# Altium PCB XPIAC_1V3.PCBDOC (part 4 of 4)
Units mil, origin at the board's own origin, x right, y up, seen from the top; angles counter-clockwise.
Board outline 2900 x 2135 mil, 6 copper layers (Top Layer, Internal Plane 1, Mid-Layer 1, Mid-Layer 2, Mid-Layer 3, Bottom Layer); 175 components, 110 nets, 675 pads, 395 vias.
Unrouted connection lines stored in the file: 142.
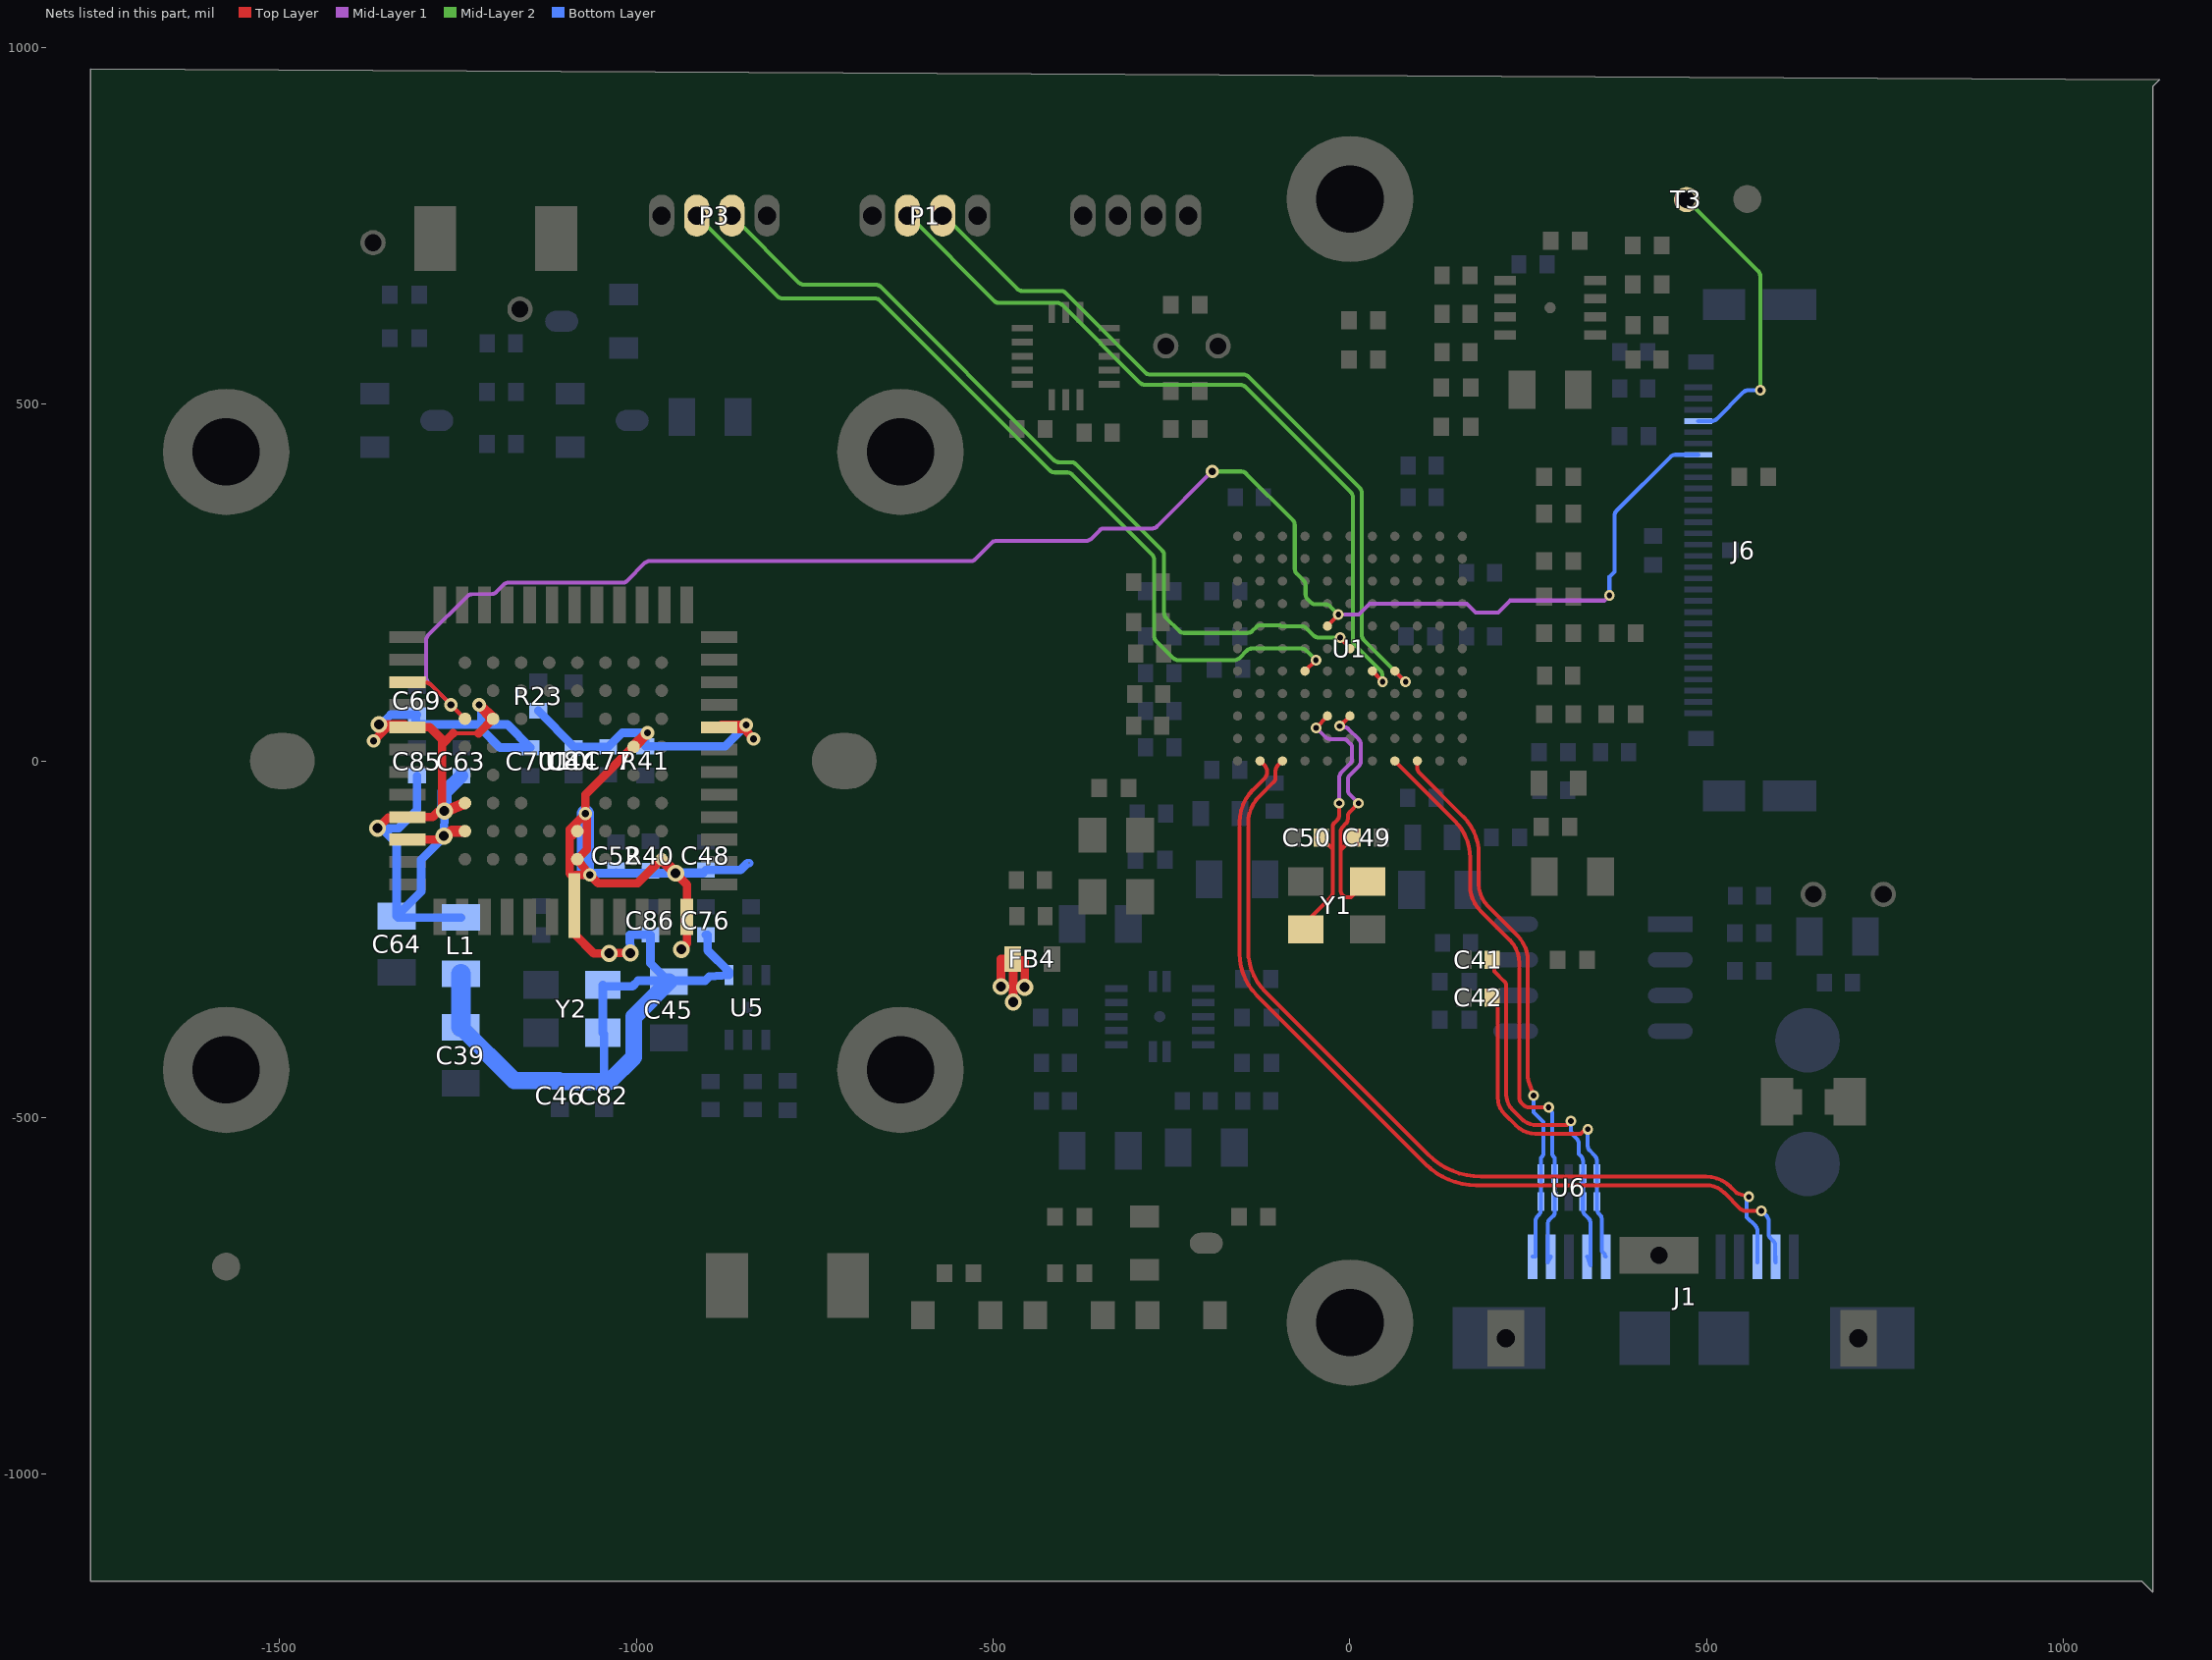
[diagram p8: the nets of this part, all layers, seen from the top]

## Via types
v1: diameter 15, hole 7.87, Top Layer to Bottom Layer, 163 vias
v2: diameter 19, hole 9.84, Top Layer to Bottom Layer, 131 vias
v3: diameter 23.62, hole 13.78, Top Layer to Bottom Layer, 77 vias
v4: diameter 27.95, hole 15.75, Top Layer to Bottom Layer, 17 vias
v5: diameter 0, hole 0, Top Layer to Bottom Layer, 3 vias
v6: diameter 20.47, hole 11.81, Top Layer to Bottom Layer, 2 vias
v7: diameter 35, hole 19.68, Top Layer to Bottom Layer, 2 vias

## Nets (pads, with @x,y where several pads share a name; then routed paths per layer and width w, separated by ;. In a path a pad name is that pad's centre, name@x,y a point inside that pad or via, vN(x,y) a via of type N, cw(c..) or ccw(c..) an arc to the next point about the centre after c; other vN are vias at no path point) (continued)
SS_DM: J1.2 U1.A10 | length 1264.1
  Top Layer w5.5: U1.A10@-125.98,0 -119.06,-6.93 cw(c-125.86,-13.73) -116.24,-13.73 -116.24,-16.93 cw(c-125.86,-16.93) -119.06,-23.73 -135.71,-40.39 ccw(c-90.3,-85.8) -154.52,-85.8 -154.52,-269.94 ccw(c-70.93,-269.94) -130.04,-329.05 106.19,-565.28 ccw(c176.95,-494.51) 176.95,-594.59 498.58,-594.59 cw(c498.58,-631.87) 524.95,-605.51 547.29,-627.85 ccw(c554.09,-621.04) 554.09,-630.67 v1(576.73,-630.67)
  Bottom Layer w5.5: v1(576.73,-630.67) 583.89,-637.83 cw(c577.09,-644.63) 586.71,-644.63 586.71,-662.18 ccw(c596.34,-662.18) 589.53,-668.99 593.34,-672.8 cw(c586.54,-679.61) 596.16,-679.61 596.16,-699.87 ccw(c605.79,-699.87) 596.24,-701.12 596.46,-702.75 J1.2@596.46,-694.88
SS_DP: J1.3 U1.A9 | length 1241.9
  Top Layer w5.5: U1.A9@-94.49,0 -101.42,-6.93 ccw(c-94.61,-13.73) -104.24,-13.73 -104.24,-22.93 cw(c-113.86,-22.93) -107.06,-29.74 -127.04,-49.72 ccw(c-89.66,-87.1) -142.52,-87.1 -142.52,-266.21 ccw(c-61.92,-266.21) -118.91,-323.2 109.62,-551.74 ccw(c184.1,-477.26) 184.1,-582.59 499.03,-582.59 cw(c499.03,-630.78) 533.11,-596.7 540.59,-604.18 ccw(c547.39,-597.37) 544.6,-606.58 v1(559.06,-610.97)
  Bottom Layer w5.5: v1(559.06,-610.97) 556.26,-613.77 556.26,-639.54 568.05,-651.33 cw(c561.24,-658.13) 570.87,-658.13 570.87,-702.75 J1.3@570.87,-694.88
SS_RX_M: J1.9 U1.A4 U6.4 U6.7 | length 817.7
  Top Layer w5.5: U1.A4@62.99,0 146.79,-83.79 cw(c94.58,-136) 168.41,-136 168.41,-174.58 ccw(c218.81,-174.58) 183.17,-210.21 223.92,-250.97 cw(c191.47,-283.41) 237.36,-283.41 237.36,-472.52 ccw(c246.99,-472.52) 240.18,-479.33 243.54,-482.68 ccw(c250.34,-475.88) 250.34,-485.5 v1(278.44,-485.5)
  Bottom Layer w5.5: v1(278.44,-485.5) 280.5,-487.56 cw(c273.69,-494.36) 283.31,-494.36 283.31,-548.59 ccw(c292.94,-548.59) 286.13,-555.4 287.16,-556.42 U6.7@287.16,-578.16 ; J1.9@281.5,-694.88 277.2,-702.75 277.2,-649.48 cw(c286.83,-649.48) 280.02,-642.67 284.34,-638.35 ccw(c277.53,-631.55) 287.16,-631.55 U6.4@287.16,-617.53
  Bottom Layer w5.6: U6.4@287.16,-617.53 U6.7@287.16,-578.16
SS_RX_P: J1.10 U1.A3 U6.5 U6.6 | length 766.8
  Top Layer w5.5: U1.A3@94.49,0 94.49,-9.74 ccw(c104.11,-9.74) 97.31,-16.55 158.67,-77.91 cw(c105.76,-130.83) 180.59,-130.83 180.59,-172.44 ccw(c224.58,-172.44) 193.48,-203.55 234.42,-244.49 cw(c198.35,-280.57) 249.36,-280.57 249.36,-444.36 ccw(c258.99,-444.36) 249.88,-447.48 v1(257.23,-468.91)
  Top Layer w5.6: v1@256.68,-468.36 v1(257.23,-468.91)
  Bottom Layer w5.5: J1.10@255.91,-694.88 260.17,-694.88 260.17,-644.76 cw(c269.79,-644.76) 262.99,-637.95 264.65,-636.28 ccw(c257.85,-629.48) 267.47,-629.48 U6.5@267.47,-617.53 ; 257.23,-492.13 271.31,-506.21 271.31,-548.59 cw(c261.69,-548.59) 268.5,-555.4 267.47,-556.42 U6.6@267.47,-578.16
  Bottom Layer w5.6: 257.23,-492.13 v1(257.23,-468.91) ; U6.5@267.47,-617.53 U6.6@267.47,-578.16
SS_TX_M: C42.2 J1.6 U6.1 U6.10 | length 500.2
  Top Layer w5.5: C42.2@199.37,-331.68 204.34,-336.65 cw(c197.53,-343.45) 207.16,-343.45 207.16,-471.91 ccw(c239.56,-471.91) 216.65,-494.82 232.95,-511.12 ccw(c260.12,-483.95) 260.12,-522.37 323.2,-522.37 329.36,-516.22 v1(333.35,-516.22)
  Bottom Layer w5.5: v1(333.35,-516.22) 333.35,-539.57 ccw(c342.97,-539.57) 336.17,-546.38 343.39,-553.6 cw(c336.59,-560.41) 346.21,-560.41 U6.10@346.21,-578.16
  Bottom Layer w5.6: U6.10@346.21,-578.16 U6.1@346.21,-617.53 U6.1@346.21,-627.98 ; J1.6@358.27,-694.88 357.42,-694.04 357.42,-691.47 353.09,-687.14 353.09,-642.97 ; U6.1@346.21,-627.98 ccw(c356.01,-627.98) 349.08,-634.91 ; U6.1@346.21,-627.98 ccw(c356.01,-627.98) 349.08,-634.91 ; 349.08,-634.91 350.22,-636.04 ; 350.22,-636.04 cw(c343.29,-642.97) 353.09,-642.97 ; 350.22,-636.04 cw(c343.29,-642.97) 353.09,-642.97
SS_TX_P: C41.2 J1.7 U6.2 U6.9 | length 538.6
  Top Layer w5.5: C41.2@199.37,-278.88 202.19,-278.88 202.19,-294.89 216.34,-309.04 cw(c209.53,-315.84) 219.16,-315.84 219.16,-467.77 ccw(c249.53,-467.77) 228.05,-489.26 239.9,-501.1 ccw(c262.29,-478.71) 262.29,-510.37 304.02,-510.37 v1(309.59,-504.81)
  Bottom Layer w5.5: v1(309.59,-504.81) 309.59,-517.18 ccw(c319.21,-517.18) 312.41,-523.98 317.81,-529.39 cw(c311.01,-536.19) 320.63,-536.19 320.63,-550.74 320.85,-550.74 323.71,-553.6 cw(c316.9,-560.41) 326.53,-560.41 U6.9@326.53,-578.16
  Bottom Layer w5.6: U6.9@326.53,-578.16 U6.2@326.53,-617.53 326.53,-629.03 ccw(c336.33,-629.03) 329.4,-635.96 334.36,-640.93 cw(c327.43,-647.86) 337.23,-647.86 337.23,-707.31 J1.7@332.68,-694.88
STANDBY: J6.7 U1.G7 U8.F8 U10.33 | length 2549.8
  Top Layer w5.6: U10.33@-1320.87,110.24 -1320.23,109.6 -1294.76,109.6 cw(c-1294.76,99.8) -1287.83,106.73 v2(-1259.84,78.74) ; U1.G7@-31.5,188.98 v1(-16.17,205.35)
  Top Layer w6: v2(-1259.84,78.74) U8.F8@-1240.16,59.06
  Mid-Layer 1 w5.5: v2(-1259.84,78.74) -1291.7,110.6 ; v2(-192.93,405.78) -270.01,328.7 ; -1294.52,117.41 ccw(c-1284.9,117.41) -1291.7,110.6 ; -1294.52,117.41 ccw(c-1284.9,117.41) -1291.7,110.6 ; -1294.52,117.41 -1294.52,169.2 ; -1294.52,169.2 cw(c-1284.9,169.2) -1291.7,176 ; -1294.52,169.2 cw(c-1284.9,169.2) -1291.7,176 ; -1291.7,176 -1236.77,230.93 ; -1236.77,230.93 cw(c-1229.97,224.13) -1229.97,233.75 ; -1236.77,230.93 cw(c-1229.97,224.13) -1229.97,233.75 ; -1229.97,233.75 -1203.22,233.75 ; -1203.22,233.75 ccw(c-1203.22,243.38) -1196.41,236.57 ; -1203.22,233.75 ccw(c-1203.22,243.38) -1196.41,236.57 ; -1196.41,236.57 -1186.08,246.91 ; -1186.08,246.91 cw(c-1179.27,240.1) -1179.27,249.72 ; -1186.08,246.91 cw(c-1179.27,240.1) -1179.27,249.72 ; -1179.27,249.72 -1019.67,249.72 ; -1019.67,249.72 ccw(c-1019.67,259.35) -1012.86,252.54 ; -1019.67,249.72 ccw(c-1019.67,259.35) -1012.86,252.54 ; -1012.86,252.54 -988.19,277.21 ; -988.19,277.21 cw(c-981.38,270.41) -981.38,280.03 ; -988.19,277.21 cw(c-981.38,270.41) -981.38,280.03 ; -981.38,280.03 -531.9,280.03 ; -531.9,280.03 ccw(c-531.9,289.66) -525.09,282.85 ; -531.9,280.03 ccw(c-531.9,289.66) -525.09,282.85 ; -525.09,282.85 -502.27,305.68 ; -502.27,305.68 cw(c-495.46,298.87) -495.46,308.5 ; -502.27,305.68 cw(c-495.46,298.87) -495.46,308.5 ; -495.46,308.5 -369.59,308.5 ; -369.59,308.5 ccw(c-369.59,318.12) -362.78,311.32 ; -369.59,308.5 ccw(c-369.59,318.12) -362.78,311.32 ; -362.78,311.32 -351.03,323.07 ; -351.03,323.07 cw(c-344.22,316.26) -344.22,325.89 ; -351.03,323.07 cw(c-344.22,316.26) -344.22,325.89 ; -344.22,325.89 -276.81,325.89 ; -276.81,325.89 ccw(c-276.81,335.51) -270.01,328.7 ; -276.81,325.89 ccw(c-276.81,335.51) -270.01,328.7
  Mid-Layer 1 w5.6: v1(-16.17,205.35) 12.52,205.35 27.36,220.2 163.88,220.2 175.97,208.11 207.83,208.11 224.51,224.78 356.41,224.78 v1(363.7,232.07)
  Mid-Layer 2 w5.6: v2(-192.93,405.78) -152.37,405.78 ; v1(-16.17,205.35) -27.34,216.52 ; -152.37,405.78 cw(c-152.37,395.98) -145.44,402.91 ; -152.37,405.78 cw(c-152.37,395.98) -145.44,402.91 ; -145.44,402.91 -80.23,337.69 ; -80.23,337.69 cw(c-87.16,330.76) -77.36,330.76 ; -80.23,337.69 cw(c-87.16,330.76) -77.36,330.76 ; -77.36,269.4 ccw(c-67.56,269.4) -74.49,262.47 ; -77.36,269.4 ccw(c-67.56,269.4) -74.49,262.47 ; -77.36,269.4 -77.36,330.76 ; -74.49,262.47 -65.05,253.03 ; -65.05,253.03 cw(c-71.98,246.1) -62.18,246.1 ; -65.05,253.03 cw(c-71.98,246.1) -62.18,246.1 ; -62.18,233.55 ccw(c-52.38,233.55) -59.31,226.62 ; -62.18,233.55 ccw(c-52.38,233.55) -59.31,226.62 ; -62.18,233.55 -62.18,246.1 ; -59.31,226.62 -54.95,222.26 ; -54.95,222.26 ccw(c-48.02,229.19) -48.02,219.39 ; -54.95,222.26 ccw(c-48.02,229.19) -48.02,219.39 ; -48.02,219.39 -34.27,219.39 ; -34.27,219.39 cw(c-34.27,209.59) -27.34,216.52 ; -34.27,219.39 cw(c-34.27,209.59) -27.34,216.52
  Bottom Layer w5.6: v1(363.7,232.07) 363.7,258.15 370.88,265.33 370.88,343.79 cw(c380.68,343.79) 373.75,350.71 449.29,426.26 cw(c456.22,419.33) 456.22,429.13 J6.7@488.19,429.13
TCK: P3.3 U1.F6 | length 1174.5
  Top Layer w5.6: v1(-13.79,172.88) U1.F6@0,157.48
  Mid-Layer 2 w5.6: P3.3@-866.14,764.21 -772.36,670.43 ccw(c-765.43,677.36) -765.43,667.56 -664.57,667.56 cw(c-664.57,657.76) -657.64,664.69 -414.48,421.53 ccw(c-407.55,428.46) -407.55,418.66 -390.84,418.66 cw(c-390.84,408.86) -383.91,415.79 -263.34,295.22 cw(c-270.26,288.29) -260.47,288.29 -260.47,207.26 ccw(c-250.67,207.26) -257.59,200.33 -239.56,182.3 ccw(c-232.63,189.23) -232.63,179.43 -143.5,179.43 ccw(c-143.5,189.23) -136.57,182.3 -131.47,187.4 cw(c-124.54,180.47) -124.54,190.27 -97.48,190.27 -96.15,188.94 -68.1,188.94 cw(c-68.1,179.14) -61.17,186.07 -50.85,175.75 ccw(c-43.92,182.68) -43.92,172.88 v1(-13.79,172.88)
TEST2: J6.4 T3.1 | length 413.3
  Mid-Layer 2 w5.6: T3.1@471.77,786.79 572.08,686.49 cw(c565.15,679.56) 574.95,679.56 v1(574.95,519.62)
  Bottom Layer w5.6: J6.4@488.19,476.38 507.01,476.38 ccw(c507.01,486.18) 513.94,479.25 551.44,516.75 cw(c558.37,509.82) 558.37,519.62 v1(574.95,519.62)
TMS: P3.2 U1.E8 | length 1224.2
  Top Layer w5.6: U1.E8@-62.99,125.98 v1(-47.62,141.36)
  Mid-Layer 2 w5.6: P3.2@-915.35,764.21 -802.3,651.15 ccw(c-795.37,658.08) -795.37,648.28 -665.75,648.28 cw(c-665.75,638.48) -658.82,645.41 -420.64,407.24 ccw(c-413.71,414.17) -413.71,404.37 -396.42,404.37 cw(c-396.42,394.57) -389.49,401.5 -277.37,289.38 cw(c-284.3,282.45) -274.5,282.45 -274.5,175.29 ccw(c-264.7,175.29) -271.63,168.36 -247.43,144.17 ccw(c-240.5,151.1) -240.5,141.3 -161.93,141.3 ccw(c-161.93,151.1) -155,144.17 -144.51,154.66 cw(c-137.58,147.73) -137.58,157.53 -67.86,157.53 cw(c-67.86,147.73) -60.93,154.66 v1(-47.62,141.36)
UART_RX: P1.3 U1.E4 | length 1059.9
  Top Layer w5.6: U1.E4@62.99,125.98 v1(78.08,110.93)
  Mid-Layer 2 w5.6: P1.3@-570.87,764.21 -568.69,764.21 -466.17,661.69 ccw(c-459.24,668.62) -459.24,658.82 -405.42,658.82 cw(c-405.42,649.02) -398.49,655.95 -286.98,544.45 ccw(c-280.05,551.38) -280.05,541.58 -149.13,541.58 cw(c-149.13,531.78) -142.2,538.71 13.64,382.86 cw(c6.71,375.93) 16.51,375.93 16.51,176.56 ccw(c26.31,176.56) 19.38,169.63 v1(78.08,110.93)
UART_TX: P1.2 U1.E5 | length 1083.6
  Top Layer w5.6: U1.E5@31.5,125.98 v1(45.83,111.1)
  Mid-Layer 2 w5.6: P1.2@-620.08,764.21 -617.9,764.21 -498.49,644.8 ccw(c-491.56,651.73) -491.56,641.93 -410.03,641.93 cw(c-410.03,632.13) -403.1,639.06 -294.04,529.99 ccw(c-287.11,536.92) -287.11,527.12 -153.34,527.12 cw(c-153.34,517.32) -146.41,524.25 1.22,376.62 cw(c-5.7,369.69) 4.1,369.69 4.1,169.48 ccw(c13.9,169.48) 6.97,162.55 42.67,126.85 cw(c35.74,119.92) 45.54,119.92 45.54,111.39 v1(45.83,111.1)
VAA3.3V: C63.2 C64.2 C69.2 C70.2 C85.2 L1.2 U8.B8 U8.C8 U8.F7 U10.35 U10.39 U10.40 | length 1520.5
  Top Layer w6: -1256.88,38.79 -1221.06,38.79
  Top Layer w12: v2(-1368.2,28.08) -1349.04,47.24 U10.35@-1320.87,47.24 ; v3(-1362.92,-94.35) -1347.66,-79.08 -1321.21,-79.08 U10.39@-1320.87,-78.74 -1285.47,-78.74 -1277.03,-70.3 v3@-1272.43,-68.48 ; v3(-1360.81,51.3) -1324.92,51.3 U10.35@-1320.87,47.24 ; U10.40@-1320.87,-110.24 -1273.33,-110.24 v3(-1269.58,-105.38) v3@-1269.85,-105.43 ; v3@-1266.8,-70.3 v3(-1268.86,-70.3) -1270.68,-68.48 v3@-1272.43,-68.48 ; -1256.88,38.79 -1272.43,23.23 ; -1221.06,38.79 U8.F7@-1200.79,59.06 ; U10.35@-1320.87,47.24 -1289.51,47.24 -1272.43,30.17 -1272.43,23.23 ; v3@-1272.43,-68.48 -1272.43,23.23
  Top Layer w15.75: v3@-1269.85,-105.43 -1258.45,-98.43 U8.B8@-1240.16,-98.43 ; v3@-1266.8,-70.3 U8.C8@-1240.16,-59.06 ; v2(-1220.47,78.74) U8.F7@-1200.79,59.06
  Bottom Layer w12: v3(-1362.92,-94.35) v3@-1357.17,-94.35 ; v3(-1360.81,51.3) -1357.71,51.3 -1344.2,64.81 C69.2@-1309.07,64.81 ; C85.2@-1307.51,-20.75 -1307.51,-68.54 -1333.32,-94.35 v3@-1357.17,-94.35 ; C69.2@-1307.51,64.81 C69.2@-1309.07,64.81 ; v3(-1268.86,-70.3) v3(-1269.58,-105.38) -1269.58,-106.39 -1301.59,-138.4 -1301.59,-183.21 C64.2@-1335.86,-217.48 ; L1.2@-1245.82,-219.45 -1333.9,-219.45 C64.2@-1335.86,-217.48 ; v2(-1220.47,78.74) -1217.43,75.7 -1217.43,51.25 ; v3@-1357.17,-94.35 -1335.86,-115.65 C64.2@-1335.86,-217.48 ; C69.2@-1309.07,64.81 -1309.07,51.25 -1217.43,51.25 ; -1217.43,51.25 -1180.99,51.25 C70.2@-1148.35,18.62 -1191.2,18.62 -1217.43,44.85 -1217.43,51.25
  Bottom Layer w20: v3(-1268.86,-70.3) -1268.86,-43 -1267.39,-43 C63.2@-1245.14,-20.75
VDD3.3V: C39.2 C44.2 C45.2 C46.2 C48.2 C52.2 C76.1 C77.2 C82.2 C86.2 FB4.1 L1.1 R23.2 R40.2 R41.2 U5.1 U8.A1 U8.A4 U8.B4 U8.E2 U10.1 U10.6 U10.14 Y2.1 Y2.4 | length 2936.6
  Top Layer w12: U8.B4@-1082.68,-98.43 -1093.52,-107.68 ; v3(-1038.03,-269.81) v3@-1040.73,-269.81 ; v3(-1008.49,-269.19) -1040.11,-269.19 v3@-1040.73,-269.81 ; U8.E2@-1003.94,19.69 -1004.49,19.69 -1071.39,-47.22 v2(-1071.39,-73.77) v2@-1071.39,-73.86 ; U8.A1@-964.57,-137.8 -998.28,-171.51 -1053.52,-171.51 v2(-1065.27,-159.76) ; v3(-944.88,-157.48) -928.81,-173.55 -928.81,-218.18 U10.6@-929.13,-218.5 -929.13,-256.23 v3(-937.14,-264.23) ; v2(-845.91,50.29) -880.81,50.29 U10.14@-883.86,47.24 -881.47,44.86 -848.71,44.86 v2(-835.66,30.77) ; v3(-489.19,-316.29) -489.19,-277.67 FB4.1@-472.75,-277.67 -471.97,-270.93 FB4.1@-471.97,-279.59 ; v3(-471.97,-337.94) FB4.1@-471.97,-279.59 ; v3(-455.73,-317.28) -455.73,-279.59 FB4.1@-471.97,-279.59 ; -1093.52,-107.68 -1093.52,-157.82 U10.1@-1086.61,-164.72 ; -1093.52,-107.68 -1093.52,-96.26 -1071.39,-74.13 v2@-1071.39,-73.86 ; U10.1@-1086.61,-164.72 -1086.61,-161.08 -1085.29,-159.76 v2(-1065.27,-159.76) ; U10.1@-1086.61,-164.72 U10.1@-1086.61,-202.76 -1086.61,-242.76 -1059.56,-269.81 v3@-1040.73,-269.81 ; v2@-1071.39,-73.86 -1071.13,-74.11 -1069.23,-76.68 -1069.23,-124.35 U8.A4@-1082.68,-137.8 v2(-1065.27,-159.76)
  Top Layer w15.75: U8.E2@-1003.94,19.69 v2(-984.25,39.37) ; U8.A1@-964.57,-137.8 v3(-944.88,-157.48)
  Bottom Layer w5.5: R40.2@-980.26,-153.67 -1023.87,-153.67 C52.2@-1028.36,-152.89 -1028.36,-157.48 v2@-1061.6,-157.48 ; v3(-944.88,-157.48) -940.29,-152.89 C48.2@-902.56,-152.89 ; v2@-1061.6,-157.48 -1062.43,-158.31 v2(-1065.27,-159.76) v2@-1061.6,-157.48
  Bottom Layer w12: C39.2@-1245.9,-373.25 C39.2@-1245.82,-373.17 ; R23.2@-1137.64,70.49 -1087.56,19.69 C77.2@-1039.44,19.69 -1019.78,39.37 v2(-984.25,39.37) -987.66,35.96 R41.2@-987.66,20.47 -875.73,20.47 v2(-845.91,50.29) ; v2@-1071.39,-153.64 v2(-1065.27,-159.76) ; v2@-1061.6,-157.48 -906.26,-157.48 -906.26,-156.58 C48.2@-902.56,-152.89 -854.16,-152.89 -844.37,-143.1 v5(-841.72,-143.1) ; C82.2@-1045.08,-449.44 -1045.08,-382.99 Y2.1@-1047.13,-380.95 Y2.4@-1047.13,-314.02 -1047.13,-315.99 -1005.33,-315.99 -997.46,-308.11 C45.2@-959.6,-308.11 ; v3(-1008.49,-269.19) -1009.29,-243.56 C86.2@-980.26,-243.56 -980.26,-283.63 C45.2@-954.45,-309.44 C45.2@-959.6,-308.11 ; C76.1@-902.56,-243.56 -900,-243.56 -900,-265.69 -869.97,-295.73 U5.1@-869.97,-300.25 -897.77,-302.22 -903.66,-308.11 C45.2@-959.6,-308.11
  Bottom Layer w23.62: C39.2@-1245.9,-373.25 -1171.2,-447.96 -1108.58,-447.96 C46.2@-1107.11,-449.44 C82.2@-1049.62,-449.44 ; v2@-1071.39,-153.64 v2(-1071.39,-73.77) ; C82.2@-1045.08,-449.44 C82.2@-1049.62,-449.44 ; C45.2@-954.45,-309.44 -1003.43,-358.43 -1003.43,-414.9 -1037.97,-449.44 C82.2@-1049.62,-449.44
  Bottom Layer w27.56: C39.2@-1245.82,-373.17 L1.1@-1245.82,-298.19
XTI: C49.2 U1.C6 Y1.1 | length 367.1
  Top Layer w5.5: v1(12,-59.26) -0.18,-71.44 ccw(c6.62,-78.25) -3,-78.25 -3,-81.32 cw(c-12.62,-81.32) -5.82,-88.13 -10.13,-92.44 ccw(c-3.33,-99.25) -12.95,-99.25 -12.95,-125.26 -12.95,-181.63 ccw(c-3.33,-181.63) -3.33,-191.26 1.56,-191.26 21.85,-170.96 Y1.1@24.81,-169
  Top Layer w5.6: v1(-14.48,48.87) -14.3,48.69 U1.C6@0,62.99 ; -12.95,-125.26 4.31,-107.99 C49.2@4.31,-107.26
  Mid-Layer 1 w5.5: v1(-14.48,48.87) -14.48,47.24 -8.49,47.24 cw(c-8.49,37.62) -1.68,44.43 12.18,30.56 cw(c5.38,23.75) 15,23.75 15,-0.82 cw(c5.38,-0.82) 12.18,-7.63 -0.18,-19.99 ccw(c6.62,-26.8) -3,-26.8 -3,-40.27 ccw(c6.62,-40.27) -0.18,-47.08 v1(12,-59.26)
XTO: C50.1 U1.C7 Y1.3 | length 387.9
  Top Layer w5.5: Y1.3@-61.81,-235.92 -58.85,-233.96 -58.85,-223.11 -26.99,-191.25 ccw(c-33.79,-184.44) -24.17,-184.44 -24.17,-123.57 -24.17,-93.13 cw(c-14.54,-93.13) -21.35,-86.32 -17.82,-82.8 ccw(c-24.62,-75.99) -15,-75.99 v1(-15,-59.26)
  Top Layer w5.6: v1(-47.24,46.27) U1.C7@-31.5,62.99 ; C50.1@-40.31,-107.26 -40.31,-107.43 -24.17,-123.57
  Mid-Layer 1 w5.5: v1(-47.24,46.27) -34.54,33.56 ccw(c-27.73,40.37) -27.73,30.74 -9.99,30.74 cw(c-9.99,21.12) -3.18,27.92 0.18,24.56 cw(c-6.62,17.75) 3,17.75 3,2.87 cw(c-6.62,2.87) 0.18,-3.93 -12.18,-16.29 ccw(c-5.38,-23.1) -15,-23.1 v1(-15,-59.26)
pads on no net: J6.18 J6.19 J6.20 J6.31 J6.32 LM1.1 LM1.2 M1.1 M2.1 P3.1 U1.A11 U1.B11 U1.C4 U1.C10 U1.D11 U1.E1 U1.E7 U1.F5 U1.FID1 U1.FID2 U1.G6 U1.H6 U1.K5 U1.L8 U5.5 U8.A2 U8.A3 U8.A6 U8.B2 U8.B3 U8.B6 U8.D7 U8.D8 U8.E7 U8.E8 U8.G3 U8.G5 U8.H5 U9.7 U10.2 U10.3 U10.4 U10.5 U10.22 U10.26 U10.36 U10.37 U10.44 U10.45
copper on no net: | length 5636.4
  Top Layer w3.94: 161.44,117.01 ccw(c135.24,117.01) 161.44,117.01
  Mid-Layer 2 w9.84: -1502.85,-432.56 ccw(c-1575.42,-432.56) -1502.85,-432.56 ; -1501.61,433.72 ccw(c-1574.18,433.72) -1501.61,433.72 ; -558.07,-433.78 ccw(c-630.64,-433.78) -558.07,-433.78 ; -557.45,433.63 ccw(c-630.02,433.63) -557.45,433.63 ; 72.31,786.58 ccw(c-0.26,786.58) 72.31,786.58 ; 73.01,-786.55 ccw(c0.44,-786.55) 73.01,-786.55
  Mid-Layer 3 w9.84: -1503.22,-433.04 ccw(c-1575.79,-433.04) -1503.22,-433.04 ; -1501.97,433.25 ccw(c-1574.54,433.25) -1501.97,433.25 ; -558.43,-434.26 ccw(c-631,-434.26) -558.43,-434.26 ; -557.81,433.15 ccw(c-630.39,433.15) -557.81,433.15 ; 71.95,786.1 ccw(c-0.62,786.1) 71.95,786.1 ; 72.65,-787.03 ccw(c0.08,-787.03) 72.65,-787.03

## Polygon pours and split planes (outlines as drawn)
3V3 on Bottom Layer "Bottom Layer-3V3" (solid, remove dead copper, pour order 1000): -219.22,-367.19 -219.22,-476.01 -187.64,-507.59 -187.64,-599.03 -76.21,-599.03 -76.21,-477.07 -136.75,-477.07 -136.75,-367.19
1V2 on Bottom Layer "Bottom Layer-1V2" (solid, remove dead copper, pour order 1001): 243.01,211.83 243.01,287.38 182.27,287.38 182.27,211.83
1V2_U3TX on Bottom Layer "Bottom Layer-1V2_U3TX" (solid, remove dead copper, pour order 1002): 102,-247.42 102,-37.29 75,-37.29 75,34.21 28.06,34.21 28.06,-247.42
3V3 on Bottom Layer "Bottom Layer-3V3 1" (solid, remove dead copper, pour order 1003): 180.05,58.09 289.22,58.09 289.22,-55.15 234.36,-55.15 234.36,-19.34 180.05,-19.34
VAA3.3V on Bottom Layer "Bottom Layer-VAA3.3V" (solid, remove dead copper, pour order 1004): -1127.98,4.24 -1197.63,4.24 -1231.95,38.56 -1335.91,38.56 -1383.63,-9.16 -1383.63,-49.87 -1366.29,-67.22 -1332.91,-67.22 -1332.91,-12.8 -1246.23,-12.8 -1246.23,-144.57 -1211.16,-144.57 -1211.16,-241.27 -1446.14,-241.27 -1446.14,20.27 -1393.28,73.13 -1378.25,88.16 -1211.41,88.16 -1167.69,44.45 -1127.98,44.45
5V0 on Bottom Layer "Bottom Layer-5V0" (solid, remove dead copper, pour order 1005): -269.79,142.52 -205.74,142.52 -169.58,106.36 -169.58,78.46 -269.79,78.46
3V3 on Bottom Layer "Bottom Layer-3V3 2" (solid, remove dead copper, pour order 1006): 90.28,122.94 174.13,122.94 174.13,189.74 90.28,189.74
5V0 on Bottom Layer "Bottom Layer-5V0 1" (solid, remove dead copper, pour order 1007): 553.94,544.05 450.63,544.05 450.63,598.98 399.24,598.98 399.24,477.49 553.94,477.49
1V2_AVDD on Bottom Layer "Bottom Layer-1V2_AVDD" (solid, remove dead copper, pour order 1008): -28.71,-196.86 -28.71,-15.8 -94.54,-15.8 -147,-68.26 -147,-196.86
5V0 on Bottom Layer "Bottom Layer-5V0 2" (solid, remove dead copper, pour order 1009): -313.74,-225.17 -418.95,-225.17 -418.95,-492 -473.88,-492 -473.88,-577.7 -352.66,-577.7 -352.66,-483.37 -313.74,-444.45
1V2 on Bottom Layer "Bottom Layer-1V2 1" (solid, remove dead copper, pour order 1010): 23.15,324.1 99,324.1 99,443.13 23.15,443.13
VDD3.3V on Bottom Layer "Bottom Layer-VDD3.3V" (solid, remove dead copper, pour order 1011): -1117.16,58.95 -1117.16,0 -822.33,0 -822.33,58.95
AGND on Bottom Layer "Bottom Layer-AGND" (solid, remove dead copper, pour order 1012): -1640.3,-325.71 -1208.97,-325.71 -1208.97,-61.22 -1154.28,-6.53 -1154.28,121.18 -1300.58,121.18 -1300.58,171.09 -1640.3,171.09
1V2 on Bottom Layer "Bottom Layer-1V2 2" (solid, remove dead copper, pour order 1013): 91.79,72.26 91.79,6.83 151.03,-52.4 151.03,-121.27 238.5,-121.27 238.5,-26.23 188.22,-26.23 142.42,19.58 142.42,72.26
VDD3.3V on Bottom Layer "Bottom Layer-VDD3.3V 1" (solid, remove dead copper, pour order 1014): -852.28,-135.27 -1084.04,-135.27 -1084.04,-217.58 -1047.53,-254.08 -1047.53,-413.52 -1171.85,-413.52 -1215.93,-369.44 -1215.93,-286.1 -1284.12,-286.1 -1284.12,-389.42 -1200.09,-473.44 -991.4,-473.44 -991.4,-354.29 -949.73,-312.62 -871.56,-312.62 -871.56,-230.32 -1003.11,-230.32 -1003.11,-183.48 -852.28,-183.48
GND on Bottom Layer "Bottom Layer-GND" (solid, remove dead copper, pour order 1015): -1634.35,-334.3 -1203.97,-334.3 -1203.97,-67.32 -1140.63,-3.98 -1140.63,127.36 -1287.92,127.36 -1287.92,178.53 -1638.63,178.53 -1638.63,849.13 809.62,849.13 809.62,-853.11 -1634.35,-853.11
3V3 on Bottom Layer "Bottom Layer-3V3 3" (solid, remove dead copper, pour order 1016): -268.23,8.33 -185.14,8.33 -185.14,76.33 -268.23,76.33
1V2 on Bottom Layer "Bottom Layer-1V2 3" (solid, remove dead copper, pour order 1017): -267.04,301.61 -267.04,152.16 -211.94,152.16 -176.37,116.58 -176.37,24.16 -246.89,-46.37 -263.77,-63.25 -263.77,-122.65 -163.73,-122.65 -163.73,-66.86 -80.39,16.48 -80.39,166.62 -183.43,166.62 -183.43,301.61
3V3 on Mid-Layer 3 "Mid-Layer 3-3V3" (solid, remove dead copper, pour order 1018): -404.55,-184.05 -404.55,48.61 -315.09,138.07 -171.97,138.07 -171.97,58.28 -227.53,58.28 -227.53,-467.31 -154.51,-540.34 -33.34,-540.34 63.4,-443.59 557.89,-443.59 591.54,-409.94 591.54,-161.02 529.58,-99.07 529.58,483.77 495.84,517.51 495.84,829.02 -1581.46,829.02 -1581.46,541.55 -767.36,541.55 -767.36,-184.05
5V0 on Mid-Layer 3 "Mid-Layer 3-5V0" (solid, remove dead copper, pour order 1019): 506.86,825.74 506.86,525.36 539.92,492.3 539.92,-86.49 602.92,-149.5 602.92,-413.02 562.62,-453.32 73.63,-453.32 -21.72,-548.67 -159.15,-548.67 -236.82,-471 -236.82,63.41 -177.67,63.41 -177.67,134.67 -308.98,134.67 -395.33,48.33 -395.33,-374.99 -1606.76,-374.99 -1606.76,-827.91 792.58,-827.91 792.58,825.74
VDD3.3V on Mid-Layer 3 "Mid-Layer 3-VDD3.3V" (solid, remove dead copper, pour order 1020): -781.94,530.59 -1122.98,530.59 -1122.98,-361.67 -410.64,-361.67 -410.64,-192.53 -781.94,-192.53
VAA3.3V on Mid-Layer 3 "Mid-Layer 3-VAA3.3V" (solid, remove dead copper, pour order 1021): -1140.68,-360.65 -1140.68,530.59 -1604.24,530.59 -1604.24,-360.65
1V2 on Mid-Layer 3 "Mid-Layer 3-1V2" (solid, remove dead copper, pour order 1022): 365.36,516.74 365.36,-104.6 212.86,-104.6 212.86,-11.4 282,57.74 282,114.37 281.9,117.12 281.62,119.85 281.14,122.56 280.47,125.22 279.63,127.84 278.6,130.38 277.39,132.85 276.02,135.23 274.48,137.51 272.79,139.68 270.95,141.72 268.97,143.63 266.87,145.39 264.65,147.01 262.31,148.47 259.89,149.76 257.38,150.87 254.8,151.81 252.15,152.57 249.47,153.14 246.75,153.52 244,153.72 242.63,153.74 78,153.74 78,81.74 135.81,81.74 135.81,-35.26 3,-35.26 3,33.74 -48.87,33.74 -48.87,-8.9 -169.38,-8.9 -169.38,126.74 -219,126.74 -219,303.21 -83.79,303.21 -83.79,381.74 180,381.74 180,516.74
3V3 on Top Layer "Top Layer-3V3" (solid, remove dead copper, pour order 1023): 148.23,736.27 148.23,554.21 235.53,554.21 235.53,736.27
VDD3.3V on Top Layer "Top Layer-VDD3.3V" (solid, remove dead copper, pour order 1024): -1106.04,-143.87 -1106.04,-247.85 -906.43,-247.85 -906.43,-143.87
5V0 on Top Layer "Top Layer-5V0" (solid, remove dead copper, pour order 1025): -282,33.74 -117,33.74 -117,129.74 -282,129.74
1V2 on Top Layer "Top Layer-1V2" (solid, remove dead copper, pour order 1026): -219,177.74 -132,177.74 -132,129.74 -219,129.74
AGND on Top Layer "Top Layer-AGND" (solid, remove dead copper, pour order 1027): -1626.67,-312.36 -1240.3,-312.36 -1240.3,-109.65 -1184.88,-109.65 -1184.88,-46.31 -1111.25,27.32 -1111.25,106.49 -1293.35,106.49 -1293.35,151.63 -1626.67,151.63
GND on Top Layer "Top Layer-GND" (solid, remove dead copper, pour order 1028): -1623.15,-838.72 -1623.15,-319.14 -1229.62,-319.14 -1229.62,-120.96 -1172.96,-120.96 -1172.96,-38.97 -1107.11,26.88 -1107.11,113.28 -1283.77,113.28 -1283.77,162.22 -1627.46,162.22 -1627.46,389.28 -1628.48,389.28 -1628.48,835.83 798.24,835.83 798.24,-838.72
1V2 on Top Layer "Top Layer-1V2 1" (solid, remove dead copper, pour order 1029): 312.38,639.59 312.38,473.77 406.58,473.77 406.58,639.59
3V3 on Top Layer "Top Layer-3V3 1" (solid, remove dead copper, pour order 1030): 282.03,170.62 140.11,170.62 140.11,48.03 282.03,48.03
3V3 on Top Layer "Top Layer-3V3 2" (solid, remove dead copper, pour order 1031): -363.19,540.58 -363.19,454.64 -250.23,454.64 -250.23,540.58
3V3 on Top Layer "Top Layer-3V3 3" (solid, remove dead copper, pour order 1032): -147,240.74 -283.04,240.74 -283.04,129.74 -228,129.74 -228,177.74 -147,177.74
3V3 on Top Layer "Top Layer-3V3 4" (solid, remove dead copper, pour order 1033): -457.23,-109.27 -457.23,-269.1 -266.64,-269.1 -266.64,-161.04 -385.52,-161.04 -385.52,-109.27
VAA3.3V on Top Layer "Top Layer-VAA3.3V" (solid, remove dead copper, pour order 1034): -1388.52,64.02 -1241.6,64.02 -1241.6,-135.57 -1372.13,-135.57 -1372.13,-65.92 -1300.72,-65.92 -1300.72,11.93 -1388.52,11.93
1V2 on Top Layer "Top Layer-1V2 2" (solid, remove dead copper, pour order 1035): -277.55,291.95 -277.55,241.13 -152.09,241.13 -152.09,291.95
1V2_U3RX on Top Layer "Top Layer-1V2_U3RX" (solid, remove dead copper, pour order 1036): 303,-183.76 303,-26.26 216,-26.26 187.27,2.47 121.59,2.47 121.59,-93.36 211.98,-183.76
GND on Mid-Layer 2 "Mid-Layer 2-GND" (solid, remove dead copper, pour order 1037): -1632.79,-316.85 -1202.4,-316.85 -1202.4,-64.24 -1139.07,-0.9 -1139.07,130.45 -1286.35,130.45 -1286.35,169.95 -1429.66,169.95 -1429.66,170.03 -1637.07,170.03 -1637.07,843.18 798.01,843.18 798.01,-843.99 -1632.79,-843.99
1V2 on Mid-Layer 2 "Mid-Layer 2-1V2" (solid, remove dead copper, pour order 1038): -32.53,311.9 -79.42,311.9 -79.42,339.88 -141.44,401.9 -195.14,401.9 -217.83,379.21 -217.83,317.95 -197.79,297.9 -197.79,262.73 -283.63,262.73 -283.63,411.73 -227.66,467.7 -114.97,467.7 -32.53,385.26
AGND on Mid-Layer 2 "Mid-Layer 2-AGND" (solid, remove dead copper, pour order 1039): -1638.81,-310.22 -1207.48,-310.22 -1207.48,-62.06 -1152.78,-7.36 -1152.78,120.35 -1299.09,120.35 -1299.09,159.15 -1417.85,159.15 -1417.85,159.48 -1638.81,159.48
no net on Internal Plane 1 (split plane): 1114.92,945.02 1114.91,945 1114.91,-1141.21 1112.61,-1140.26 1110,-1139.91 -1754.91,-1139.91 -1754.91,959.86
no net on Internal Plane 1 (split plane): 797.62,-840.89 -1617.87,-840.89 -1617.87,-320.05 -1202.48,-320.05 -1200.52,-319.66 -1198.87,-318.55 -1197.77,-316.9 -1197.38,-314.95 -1197.38,-68.86 -1174.21,-45.69 -1076.68,-45.69 -1076.68,89.54 -1134.04,89.54 -1134.04,127.94 -1134.43,129.89 -1135.53,131.54 -1137.19,132.65 -1139.14,133.03 -1281.33,133.03 -1281.33,167.83 -1281.71,169.78 -1282.82,171.44 -1284.47,172.54 -1286.42,172.93 -1429.73,172.93 -1430.13,172.85 -1621.36,172.85 -1621.36,835.57 797.62,835.57
no net on Internal Plane 1 (split plane): -1417.85,155.67 -1304.19,155.67 -1304.19,121.75 -1303.8,119.8 -1302.7,118.15 -1301.04,117.04 -1299.09,116.65 -1157.88,116.65 -1157.88,89.54 -1196.35,89.54 -1196.35,-42.31 -1211.08,-57.04 -1212.19,-58.7 -1212.58,-60.65 -1212.58,-304.36 -1620.6,-304.36 -1620.6,155.78 -1418.43,155.78
no net on Internal Plane 1 (split plane): -1144.23,89.54 -1147.69,89.54 -1147.69,121.75 -1147.9,122.84 -1144.23,122.84
no net on Internal Plane 1 (split plane): -1291.52,127.94 -1291.31,126.85 -1293.99,126.85 -1293.99,160.77 -1294.38,162.72 -1294.39,162.73 -1291.52,162.73

## Other copper
Top Layer:
  region net VDD3.3V: -502.1,-249.28 -502.1,-339.34 -449.99,-339.34 -449.99,-249.28 -502.1,-249.28
  region net 3V3: 217.38,653.78 189.14,653.78 189.14,696.48 167.1,696.48 167.1,565.62 217.38,565.62 217.38,653.78
  region net 1V2: 352.37,625.54 352.37,564.25 311.05,564.25 311.05,476.78 360.64,476.78 360.64,529.12 392.32,529.12 392.32,625.54 352.37,625.54
  region net 3V3: -434.04,-111.6 -434.04,-288.66 -400.37,-288.66 -400.37,-111.6 -434.04,-111.6
  region net 5VIN: 626.3,-459.9 625.35,-452.71 622.57,-446 618.15,-440.25 612.4,-435.83 605.69,-433.05 598.5,-432.11 598.5,-432.34 513.72,-432.11 506.52,-433.05 499.82,-435.83 494.06,-440.25 489.64,-446 486.87,-452.71 485.92,-459.9 486.16,-459.9 485.92,-501.62 486.87,-508.81 489.64,-515.52 494.06,-521.28 499.82,-525.69 506.52,-528.47 513.72,-529.42 513.72,-529.18 598.5,-529.42 605.69,-528.47 612.4,-525.69 618.15,-521.28 622.57,-515.52 625.35,-508.81 626.3,-501.62 626.06,-501.62 626.06,-459.9
  region net GND: 359.19,695.79 276.96,695.79 254.77,673.6 254.77,535.89 213.74,535.89 213.74,492.17 262.04,492.17 282.51,512.64 282.51,551.56 301.6,570.65 301.6,655.98 316.04,670.42 359.19,670.42 359.19,695.79
  region net GND: 26.18,-777.01 403.19,-777.01 403.19,-639.12 477.09,-639.12 477.09,-773.64 782.05,-773.64 782.05,-836.78 26.18,-836.78 26.18,-777.01
  region net 5V0: 727.16,-156.63 719.96,-157.58 713.26,-160.36 707.5,-164.77 703.09,-170.53 700.31,-177.23 699.36,-184.43 699.6,-184.43 699.84,-394.15 698.89,-401.34 696.11,-408.05 691.7,-413.8 691.53,-413.63 683.57,-421.11 677.26,-429.34 673.29,-438.91 671.94,-449.19 672.28,-449.19 672.04,-499.94 672.99,-507.13 675.76,-513.83 680.18,-519.59 685.94,-524.01 692.64,-526.79 699.84,-527.73 699.84,-527.5 761.94,-527.73 769.13,-526.79 775.84,-524.01 781.59,-519.59 786.01,-513.83 788.79,-507.13 789.74,-499.94 789.5,-499.94 789.74,-184.43 788.79,-177.24 786.01,-170.53 781.59,-164.77 775.84,-160.36 769.13,-157.58 761.94,-156.63 761.94,-156.87 727.16,-156.87
Bottom Layer:
  region net VDD3.3V: -976.2,20.91 -1098.9,20.91 -1098.9,45.06 -976.2,45.06 -976.2,20.91
  region net 5VIN: 518.23,-483.59 509.02,-485.43 501.2,-490.65 495.98,-498.46 494.15,-507.68 494.61,-507.68 494.15,-559.16 495.98,-568.38 501.2,-576.19 509.02,-581.41 518.23,-583.24 518.23,-582.78 592.91,-582.32 602.12,-584.15 609.94,-589.37 615.16,-597.19 616.99,-606.4 616.53,-606.4 616.07,-701.45 617.9,-710.67 623.12,-718.48 630.94,-723.7 640.15,-725.54 640.15,-725.07 645.99,-725.07 645.53,-653.06 647.36,-643.84 652.58,-636.03 652.91,-636.35 719.95,-569.97 725.17,-562.16 727,-552.94 726.54,-552.94 727,-535.89 725.17,-526.67 719.95,-518.85 712.13,-513.63 702.92,-511.8 702.92,-512.26 593.86,-512.73 584.64,-510.89 576.83,-505.67 577.16,-505.34 563.11,-490.65 555.3,-485.43 546.08,-483.59 546.08,-484.06 518.23,-484.06
  region net 1V2: -195.15,160.02 -253.45,160.02 -253.45,182.06 -195.15,182.06 -195.15,160.02
  region net GND: -297.3,-168.08 -297.3,-514.41 -236.85,-514.41 -236.85,-241.85 -184.59,-241.85 -184.59,-168.08 -297.3,-168.08
  region net GND: 69.07,-747.63 161.86,-747.63 161.86,-669.83 229.12,-669.83 229.12,-774.39 407.19,-774.39 407.19,-643.69 439.76,-643.69 439.76,-774.39 708.24,-774.39 708.24,-691.96 780.03,-691.96 780.03,-841.8 69.07,-841.8 69.07,-747.63
  region net GND: 440.05,624.11 598.26,624.11 598.26,687.58 649.41,687.58 649.41,717.89 513.94,717.89 513.94,651.58 440.05,651.58 440.05,624.11
  region net GND: -330.24,-556.1 -330.24,-494.06 -230.48,-494.06 -230.48,-548.48 -260.14,-548.48 -260.14,-512.47 -305.3,-512.47 -305.3,-556.1 -330.24,-556.1
  pour cut-out: 547.97,-446.84 547.97,-510.97 739.19,-510.97 739.19,-446.84 547.97,-446.84
  region net 5V0: -903.08,-393.36 -903.08,-453.04 -838.75,-453.04 -838.75,-425.53 -868.38,-425.53 -868.38,-393.36 -903.08,-393.36
  region net GND: 445.74,-32.39 602.05,-32.39 602.05,-104.39 512.05,-104.39 512.05,-64.6 445.74,-64.6 445.74,-32.39
  region net GND: -823.03,-258.82 -823.03,-330.58 -913.58,-330.58 -913.58,-361.76 -822.71,-361.76 -794.17,-333.22 -739.63,-333.22 -739.63,-258.82 -823.03,-258.82
  region net VDD3.3V: -867.86,-170.31 -1020.58,-170.31 -1020.58,-235.58 -899.19,-235.58 -899.19,-298.88 -1010.14,-298.88 -1048.32,-260.7 -1048.32,-207.51 -1084.54,-207.51 -1084.54,-144.21 -867.86,-144.21 -867.86,-170.31
  region net 5V0: 718.13,-169.28 708.91,-171.11 701.1,-176.33 695.88,-184.15 694.04,-193.37 694.51,-193.37 694.97,-320.17 693.14,-329.38 687.91,-337.2 680.1,-342.42 670.88,-344.25 670.88,-343.79 635.71,-343.33 626.5,-345.16 618.68,-350.38 613.46,-358.19 611.63,-367.41 612.09,-367.41 611.63,-415.21 613.46,-424.42 618.68,-432.24 626.5,-437.46 635.71,-439.29 635.71,-438.83 744.14,-439.29 753.36,-437.46 761.17,-432.24 766.4,-424.42 768.23,-415.21 767.77,-415.21 768.23,-193.37 766.4,-184.15 761.17,-176.33 753.36,-171.11 744.14,-169.28 744.14,-169.74 718.13,-169.74
  region net GND: 474.3,-616.94 474.3,-748.47 522.06,-748.47 522.06,-666.17 497.81,-666.17 497.81,-616.94 474.3,-616.94
  region net GND: 622.1,-46.06 622.1,-320.99 674.41,-320.99 674.41,-46.06 622.1,-46.06
Internal Plane 1 (plane layer: these items are gaps in the copper):
  region: -1196.35,89.54 -1196.35,-45.69 -1076.68,-45.69 -1076.68,89.54 -1196.35,89.54
  lines w10: -1626.46,167.75 -1429.73,167.75 -1429.73,167.83 -1286.42,167.83 -1286.42,127.94 -1139.14,127.94 -1139.14,-3.41 -1202.48,-66.75 -1202.48,-314.95 -1622.97,-314.95 -1622.97,-845.98 802.71,-845.98 802.71,840.67 -1626.46,840.67 -1626.46,167.75 ; -1625.7,-309.45 -1207.48,-309.45 -1207.48,-60.65 -1152.79,-5.95 -1152.79,121.75 -1299.09,121.75 -1299.09,160.77 -1417.85,160.77 -1417.85,160.88 -1625.7,160.88 -1625.7,-309.45
Multi-Layer:
  lines w4: -1653.54,-826.77 ccw(c-1614.17,-826.77) -1614.17,-866.14 787.4,-866.14 ccw(c787.4,-826.77) 826.77,-826.77 826.77,826.77 ccw(c787.4,826.77) 787.4,866.14 -1614.17,866.14 ccw(c-1614.17,826.77) -1653.54,826.77 -1653.54,-826.77

## Silkscreen, mask and mechanical layers (free items; w line width, h text height)
Top Overlay:
  lines w9.84: -1371.78,-748.55 -964.72,-748.55 ; -1367.23,-740.96 -978.75,-740.96 ; -1362.67,-733.37 -1157.43,-733.37 ; -1358.12,-725.79 -1165.4,-725.79 ; -1353.95,-718.2 -1219.65,-718.2 ; -1349.78,-710.61 -1227.24,-710.61 ; -1345.6,-703.02 -1234.83,-703.02 ; -1341.05,-695.44 -1242.79,-695.44 ; -1336.5,-687.85 -1243.55,-687.85 ; -1331.94,-680.26 -1244.31,-680.26 ; -1328.15,-672.67 -1245.45,-672.67 ; -1323.22,-665.09 -1246.21,-665.09 ; -1319.05,-657.5 -1246.97,-657.5 ; -1315.25,-649.91 -1247.72,-649.91 ; -1310.7,-642.32 -1248.86,-642.32 ; -1306.53,-634.74 -1250,-634.74 ; -1301.6,-627.15 -1251.14,-627.15 ; -1297.42,-619.56 -1251.9,-619.56 ; -1293.25,-611.97 -1247.72,-611.97 ; -1288.7,-604.39 -1244.31,-604.39 ; -1284.14,-596.8 -1251.14,-596.8 ; -1279.59,-589.21 -1264.8,-589.21 ; -1267.45,-566.45 -1220.41,-566.45 ; -1262.9,-558.86 -1214.34,-558.86 ; -1258.73,-551.28 -1209.41,-551.28 ; -1257.59,-574.04 -1225.72,-574.04 ; -1254.17,-543.69 -1204.1,-543.69 ; -1250,-536.1 -1196.51,-536.1 ; -1245.45,-528.51 -1188.16,-528.51 ; -1243.17,-581.62 -1230.65,-581.62 ; -1242.03,-600.97 -1251.52,-619.94 -1242.03,-695.82 -1213.58,-724.27 -1204.1,-724.27 ccw(c-1209.11,-710.04) -1204.1,-695.82 -1213.58,-629.43 -1204.48,-621.46 ; -1240.9,-520.93 -1163.5,-520.93 ; -1237.1,-513.34 -1122.15,-513.34 ; -1233.69,-586.18 -1204.1,-544.07 -1185.13,-525.1 -1080.8,-506.13 ; -1232.55,-505.75 -1080.8,-505.75 ; -1228.38,-498.16 -1084.98,-498.16 ; -1223.82,-490.58 -1089.15,-490.58 ; -1220.03,-482.99 -1093.7,-482.99 ; -1215.48,-475.4 -1098.25,-475.4 ; -1210.93,-467.81 -1102.05,-467.81 ; -1206.37,-460.23 -1106.98,-460.23 ; -1205.24,-687.85 -1201.44,-687.85 ; -1204.1,-695.44 -1186.65,-695.44 ; -1204.1,-686.33 -1166.16,-705.3 ; -1202.2,-452.64 -1110.77,-452.64 ; -1198.03,-445.05 -1115.7,-445.05 ; -1196.51,-718.2 -1168.44,-718.2 ; -1195.75,-703.02 -1170.33,-703.02 ; -1194.23,-710.61 -1168.82,-710.61 ; -1193.47,-437.46 -1119.88,-437.46 ; -1191.58,-608.94 -1166.16,-600.97 -1128.22,-638.91 ; -1189.3,-429.88 -1123.67,-429.88 ; -1184.75,-422.29 -1128.98,-422.29 ; -1180.58,-414.7 -1133.16,-414.7 ; -1178.68,-635.87 -1178.68,-664.33 -1150.23,-683.3 ; -1176.02,-407.12 -1137.33,-407.12 ; -1171.85,-399.53 -1142.26,-399.53 ; -1167.3,-391.94 -1146.05,-391.94 ; -1162.75,-384.35 -1149.85,-384.35 ; -1158.57,-376.77 -1154.4,-376.77 ; -1157.06,-733.37 -993.17,-733.37 ; -1148.71,-725.79 -1006.83,-725.79 ; -1141.12,-718.2 -1022,-718.2 ; -1137.71,-714.78 -1118.74,-714.78 ccw(c-1127.81,-711.52) -1124.06,-702.64 ; -1137.33,-657.5 -1137.71,-657.5 -1156.68,-695.82 ccw(c-1147.05,-714.78) -1156.68,-733.75 -1099.77,-676.85 ; -1128.6,-641.94 -1128.6,-638.91 ; -1122.15,-703.02 -1051.21,-703.02 ; -1118.74,-695.82 -1099.77,-695.82 ccw(c-1110.11,-695.31) -1106.6,-685.57 ; -1117.6,-710.61 -1035.66,-710.61 ; -1103.18,-687.85 -1079.66,-687.85 ; -1103.18,-680.26 -1093.32,-680.26 ; -1099.39,-695.44 -1064.49,-695.44 ; -1087.25,-664.71 -1080.8,-657.88 -1061.83,-600.97 -1039.07,-578.97 ; -1084.98,-665.09 -988.99,-665.09 ; -1080.8,-657.5 -993.93,-657.5 ; -1078.15,-649.91 -997.72,-649.91 ; -1075.49,-642.32 -1002.27,-642.32 ; -1072.84,-634.74 -1006.83,-634.74 ; -1070.94,-672.67 -984.82,-672.67 ; -1070.18,-627.15 -1011,-627.15 ; -1067.9,-619.56 -1015.17,-619.56 ; -1064.87,-611.97 -1020.1,-611.97 ; -1062.59,-604.39 -1024.66,-604.39 ; -1056.9,-680.26 -980.65,-680.26 ; -1056.9,-596.8 -1028.83,-596.8 ; -1049.31,-589.21 -1032.62,-589.21 ; -1042.11,-687.85 -975.72,-687.85 ; -1041.73,-581.62 -1037.17,-581.62 ; -1028.45,-695.44 -971.16,-695.44 ; -1014.41,-703.02 -967.75,-703.02 ; -1000.38,-710.61 -963.58,-710.61 ; -985.58,-718.2 -959.02,-718.2 ; -971.54,-725.79 -954.47,-725.79 ; -956.75,-733.37 -949.54,-733.37 ; -1374.43,-753.1 -955.23,-753.1 -1276.56,-583.14 -1374.43,-753.1 ; -1268.59,-568.35 -1156.68,-372.97 -946.51,-739.06 -1268.59,-568.35 ; -991.37,-207.34 -965.8,-181.77 -942.19,-205.37 -942.19,-207.34 -991.37,-207.34 ; 59.74,-159.35 83.34,-135.75 85.31,-135.75 85.31,-184.93 59.74,-159.35 ; 134.89,-69.49 160.47,-43.92 184.08,-67.53 184.08,-69.49 134.89,-69.49 ; 201.97,722.63 225.58,699.02 251.15,724.6 201.97,724.6 201.97,722.63
  lines w10: -336.58,-534.87 96.7,-534.87 96.7,-416.76 -336.58,-416.76 -336.58,-534.87 ; -336.58,-416.51 96.7,-416.51 96.7,-298.38 -336.58,-298.38 -336.58,-416.51 ; -120.4,-534.54 96.27,-534.54 96.27,-298.38 -120.4,-298.38 -120.4,-534.54
  text "GPIO" at -166.63,651.78 h59.06
  text "UART" at -658.92,590.58 h62.99
  text "JTAG" at -936.67,589.91 h62.99
  text "XPIAC" at -1271.26,468.6 h137.8
  text "1V3" at -1162.4,368.92 h100
  text "M" at -62.06,-402.38 h68.9
  text "C" at -59.58,-522.01 h70.87
  text "REST" at -856.32,-654.04 h62.99
Bottom Overlay:
  lines w9.84: -1021.73,-448.61 -996.16,-423.03 -972.55,-446.64 -972.55,-448.61 -1021.73,-448.61
  text "XPIAC" at -494.03,208.75 h137.8
  text "1V3" at -556.44,86.85 h137.8
Drill Drawing:
  lines w1: -1496.06,0 -1496.04,0 ; -708.66,0 -708.64,0 ; -629.92,433.07 -629.9,433.07 ; 0.12,787.55 0.14,787.55 ; 826.77,866.14 826.8,866.14 ; -1574.8,-433.07 -1574.78,-433.07 ; -1574.8,-433.07 -1574.78,-433.07 ; -1653.54,-866.14 -1653.52,-866.14 ; -629.92,-433.07 -629.9,-433.07 -629.92,-433.07 ; 0.12,-787.39 0.15,-787.39 0.12,-787.39 ; 826.77,-866.14 826.8,-866.14 826.77,-866.14
  lines w10: -1653.54,-1165.55 -1653.54,-916.14 ; -1574.8,-1099.49 -1574.8,-483.07 -1574.8,-1023.88 ; -1496.06,-935.66 -1496.06,-50 ; -1289.18,-973.88 -1574.8,-973.88 ; -1288.04,-885.66 -1496.06,-885.66 ; -974.16,-1049.49 -1574.8,-1049.49 ; -916.68,-885.66 -708.66,-885.66 ; -915.54,-973.88 -629.92,-973.88 ; -708.66,-935.66 -708.66,-50 ; -629.92,-1023.88 -629.92,-483.07 ; -600.52,-1049.49 0.12,-1049.49 ; -597.93,-1115.45 -1653.54,-1115.45 ; -579.92,-433.07 958.14,-433.07 ; -579.92,433.07 958.14,433.07 ; -228.84,-1115.45 826.77,-1115.45 ; 0.12,-1099.49 0.12,-837.39 ; 50.12,-787.39 1070.75,-787.39 ; 50.12,787.55 1070.75,787.55 ; 826.77,-1165.55 826.77,-916.14 ; 876.77,-866.14 1186.58,-866.14 ; 876.77,866.14 1186.58,866.14 ; 908.14,-67.5 908.14,-433.07 ; 908.14,67.5 908.14,433.07 ; 1020.75,95.09 1020.75,-787.39 ; 1020.75,230.09 1020.75,787.55 ; 1136.58,275.26 1136.58,-866.14 ; 1136.58,410.26 1136.58,866.14 ; -1653.54,-1115.45 -1553.54,-1090.45 -1553.54,-1140.45 -1653.54,-1115.45 ; -1574.8,-1049.49 -1474.8,-1024.49 -1474.8,-1074.49 -1574.8,-1049.49 ; -1574.8,-973.88 -1474.8,-948.88 -1474.8,-998.88 -1574.8,-973.88 ; -1496.06,-885.66 -1396.06,-860.66 -1396.06,-910.66 -1496.06,-885.66 ; -708.66,-885.66 -808.66,-910.66 -808.66,-860.66 -708.66,-885.66 ; -629.92,-973.88 -729.92,-998.88 -729.92,-948.88 -629.92,-973.88 ; 0.12,-1049.49 -99.88,-1074.49 -99.88,-1024.49 0.12,-1049.49 ; 826.77,-1115.45 726.77,-1140.45 726.77,-1090.45 826.77,-1115.45 ; 908.14,-433.07 883.14,-333.07 933.14,-333.07 908.14,-433.07 ; 908.14,433.07 933.14,333.07 883.14,333.07 908.14,433.07 ; 1020.75,-787.39 995.75,-687.39 1045.75,-687.39 1020.75,-787.39 ; 1020.75,787.55 1045.75,687.55 995.75,687.55 1020.75,787.55 ; 1136.58,-866.14 1111.58,-766.14 1161.58,-766.14 1136.58,-866.14 ; 1136.58,866.14 1161.58,766.14 1111.58,766.14 1136.58,866.14
  text "44.0mm" at 1051.32,305.26 h50
  text "40.0mm" at 946.75,125.09 h50
  text "22.0mm" at 752.46,-37.5 h50
  text "20.0mm" at -1258.04,-923.16 h50
  text "24.0mm" at -1259.18,-1011.38 h50
  text "40.0mm" at -944.16,-1086.99 h50
  text "63.0mm" at -567.93,-1152.95 h50